# EAGLE board Dclock (EAGLE 8.7.0)
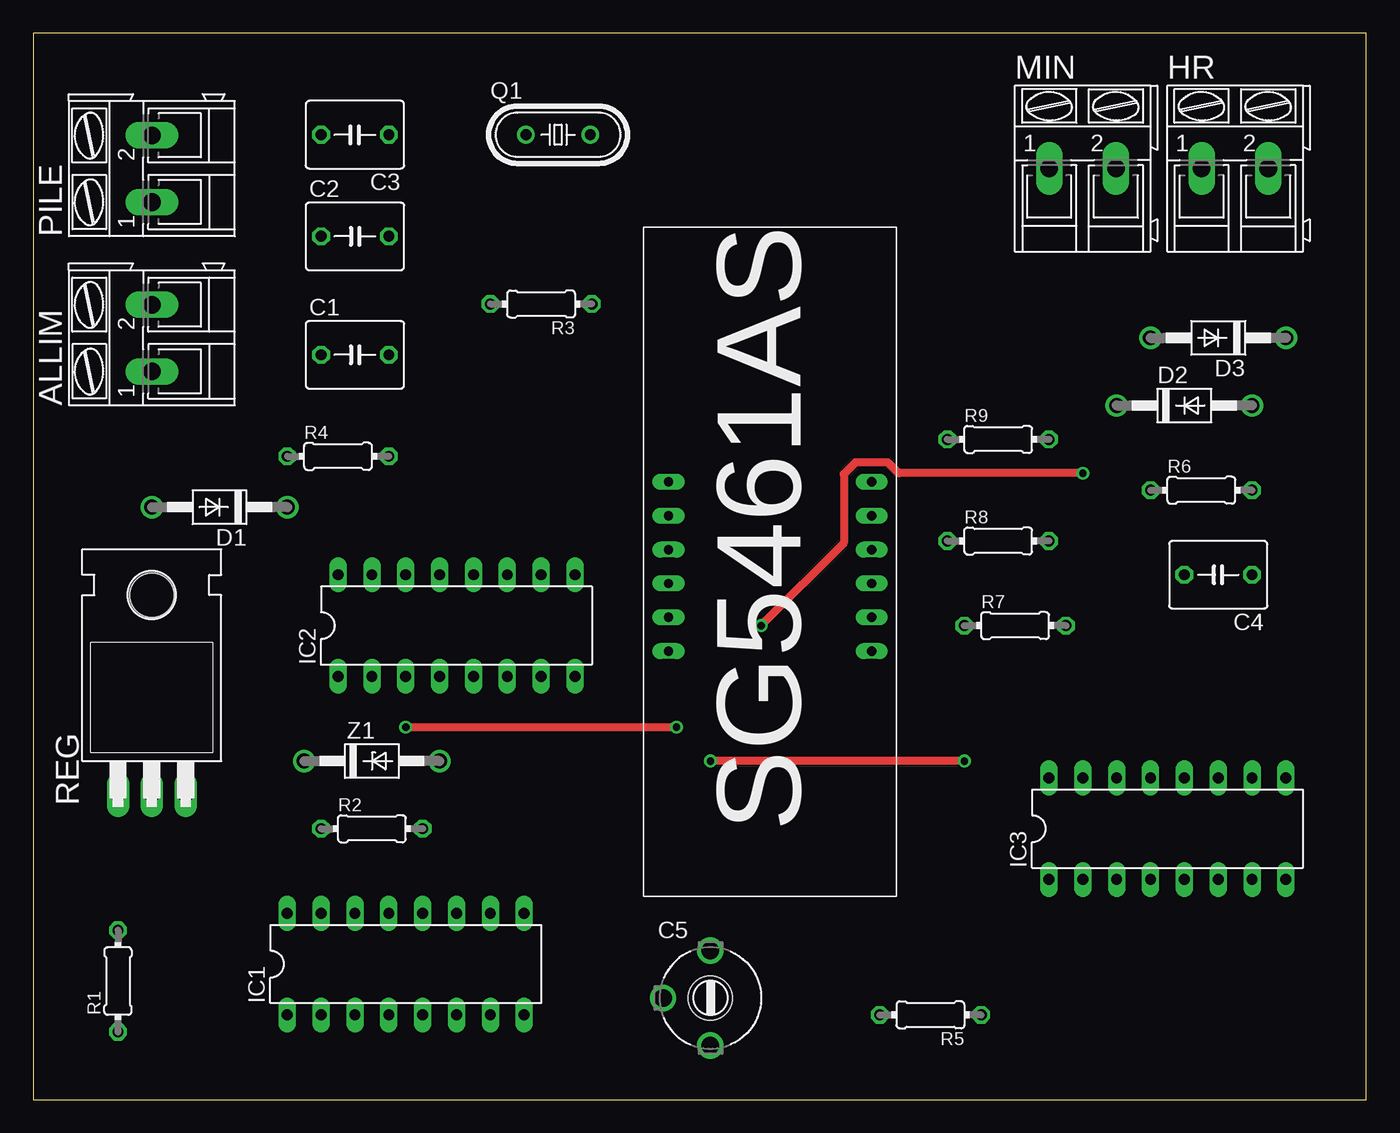
[diagram p0: board, top side]
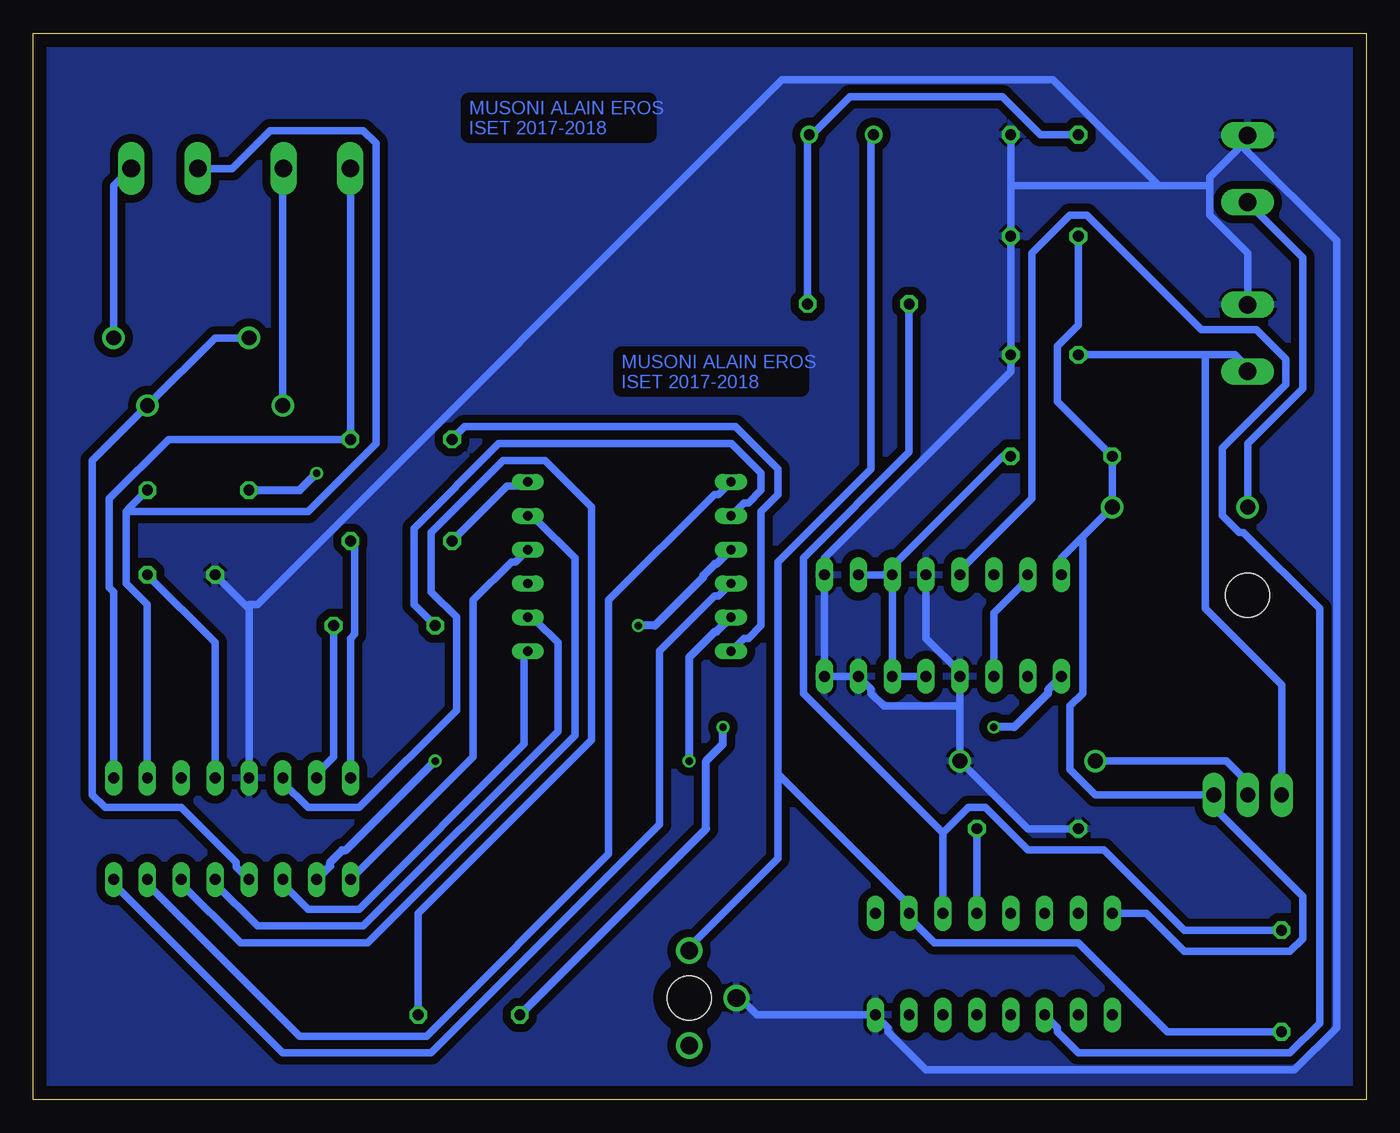
[diagram p1: board, bottom side, seen from below]

Size 100 x 80 mm. Coordinates in mm from the lower left corner, seen from the top.
Outline: 0,0 100,0 100,80 0,80 0,0
Copper layers (1*16): Top 0.035mm / dielectric 1.5mm / Bottom 0.035mm
Design rules "default *": minimum track width 22mil, minimum drill 0.35mm, track to track 22mil, track to pad 22mil, pad to pad 22mil, via to via 22mil, smd to smd 22mil, copper to edge 40mil, drill to drill 6mil, minimum pad ring 10mil, minimum via ring 8mil, stop-mask expansion 4mil, vias tented up to drill 0mil, thermal gap 10mil

## Footprints (pad centres in the part's own frame; a part is rotated, then mirrored left to right if it is on the bottom)
AK300/2 = drill 1.321 long: 1 -2.515,0; 2 2.489,0
C050-050X075 = drill 0.813 octagon: 1 -2.54,0; 2 2.54,0
CTRIM808-1 = drill 1.321: 1 -3.556,0; 2 0,-3.556; 3 3.556,0 | hole 3.302: 0,0
DO41-10 = drill 1.118: A 5.08,0; C -5.08,0
DIL16 = drill 0.813 long: 1 -8.89,-3.81; 2 -6.35,-3.81; 3 -3.81,-3.81; 4 -1.27,-3.81; 5 1.27,-3.81; 6 3.81,-3.81; 7 6.35,-3.81; 8 8.89,-3.81; 9 8.89,3.81; 10 6.35,3.81; 11 3.81,3.81; 12 1.27,3.81; 13 -1.27,3.81; 14 -3.81,3.81; 15 -6.35,3.81; 16 -8.89,3.81
HC49/S = drill 0.813: 1 -2.413,0; 2 2.413,0
0204/7 = drill 0.813 octagon: 1 -3.81,0; 2 3.81,0
TO220H = drill 1.118 long: 1 -2.54,-10.16; 2 0,-10.16; 3 2.54,-10.16 | hole 3.302: 0,4.826
4DIGIT7SEG12PIN = drill 0.7 long: P$1 18.4,1.88; P$2 20.94,1.88; P$3 23.48,1.88; P$4 26.02,1.88; P$5 28.56,1.88; P$6 31.1,1.88; P$7 31.1,17.11; P$8 28.55,17.11; P$9 26.02,17.11; P$10 23.48,17.11; P$11 20.94,17.11; P$12 18.4,17.11
DO41Z10 = drill 1.118: A 5.08,0; C -5.08,0

## Placement (x,y rotation side)
ALLIM  [AK300/2]  8.89,57.15 90 top
C1  [C050-050X075]  24.13,55.88 0 top
C2  [C050-050X075]  24.13,64.77 0 top
C3  [C050-050X075]  24.13,72.39 180 top
C4  [C050-050X075]  88.9,39.37 180 top
C5  [CTRIM808-1]  50.8,7.62 270 top
D1  1N4004  [DO41-10]  13.97,44.45 180 top
D2  1N4004  [DO41-10]  86.36,52.07 0 top
D3  1N4004  [DO41-10]  88.9,57.15 180 top
HR  [AK300/2]  90.17,69.85 0 top
IC1  4060N  [DIL16]  27.94,10.16 0 top
IC2  4027N  [DIL16]  31.75,35.56 0 top
IC3  [DIL16]  85.09,20.32 0 top
MIN  [AK300/2]  78.74,69.85 0 top
PILE  [AK300/2]  8.89,69.85 90 top
Q1  [HC49/S]  39.37,72.39 0 top
R1  [0204/7]  6.35,8.89 90 top
R2  [0204/7]  25.4,20.32 0 top
R3  [0204/7]  38.1,59.69 180 top
R4  [0204/7]  22.86,48.26 0 top
R5  [0204/7]  67.31,6.35 180 top
R6  [0204/7]  87.63,45.72 0 top
R7  [0204/7]  73.66,35.56 0 top
R8  [0204/7]  72.39,41.91 0 top
R9  [0204/7]  72.39,49.53 0 top
REG  7805T  [TO220H]  8.89,33.02 0 top
U$1  [4DIGIT7SEG12PIN]  64.77,15.24 90 top
Z1  1N4728  [DO41Z10]  25.4,25.4 0 top

## Library data of the parts
ALLIM HR MIN PILE = con-ptr500; OC_FARNELL: unknown; OC_NEWARK: unknown
C1-C5 = rcl; SPICEPREFIX: C
D1-D3 Z1 = diode
IC1 IC2 = 40xx
IC3 = ic-package
Q1 = crystal; OC_FARNELL: 1667008; OC_NEWARK: unknown
R1-R9 = rcl; SPICEPREFIX: R
REG = linear
U$1 = 4-digit-7segement

## Nets
D1: R9.1 U$1.P$12
D2: R6.1 U$1.P$9
D3: R7.1 U$1.P$8
D4: R8.1 U$1.P$6
GND: ALLIM.2 C1.2 C2.2 C3.1 C4.2 C5.2 IC1.8 IC2.4 IC2.7 IC2.8 IC2.9 IC2.12 IC3.13 PILE.2 R2.1 Z1.A
IC1_P10: C5.1 IC1.10 Q1.1 R1.1
IC2_P13: IC1.3 IC2.13
IC3_P: IC2.5 IC2.6 IC2.10 IC2.11 R4.2
IC3_P1: IC3.14 R5.1
IC3_P9: IC3.9 MIN.1 R9.2
IC3_P10: HR.1 IC3.10 R6.2
IC3_P15: IC2.3 IC2.15
LEDA: IC3.2 U$1.P$11
LEDB: IC3.7 U$1.P$7
LEDC: IC3.1 U$1.P$4
LEDD: IC3.5 U$1.P$2
LEDE: IC3.3 U$1.P$1
LEDF: IC3.8 U$1.P$10
LEDG: IC3.6 U$1.P$5
N$1: IC2.1 R5.2
N$2: D2.A D3.A IC3.4
N$3: D2.C MIN.2
N$4: D3.C HR.2
N$5: ALLIM.1 C1.1 REG.1
N$6: REG.2 Z1.C
N$7: C2.1 D1.C IC1.16 IC2.16 R4.1 REG.3
N$8: D1.A PILE.1
N$9: IC3.16 R8.2
N$10: IC3.15 R7.2
N$11: IC1.12 R2.2
N$12: IC1.11 R1.2 R3.2
N$13: C3.2 Q1.2 R3.1
N$17: U$1.P$3
V+: C4.1 IC3.12

## Tracks (layer width: path | path; a pad name or v marks a point on that pad's centre or on a via)
D1
  Bottom 0.559: R9.1 67.63,50.48 47.31,50.48 44.13,47.31 44.13,45.4 45.4,44.13 45.4,35.56 46.35,34.61 46.67,34.61 47.62,33.66 U$1.P$12
D2  (via drill 0.55)
  Top 0.61: v54.61,35.56 60.82,41.77 60.82,46.95 61.68,47.81 64.1,47.81 64.92,46.99 v78.74,46.99
  Bottom 0.61: R6.1 80.01,45.72 v78.74,46.99 | v54.61,35.56 53.36,35.56 49.73,39.19 49.73,39.33 48.87,40.19 48.73,40.19 U$1.P$9
D3
  Bottom 0.559: R7.1 71.44,37.15 71.44,42.86 65.09,49.21 47.62,49.21 45.4,46.99 45.4,45.72 46.35,44.77 46.67,44.77 47.62,43.81 U$1.P$8
D4
  Bottom 0.559: R8.1 64.45,46.04 63.18,46.04 U$1.P$6
GND
  Bottom 0.559: R2.1 25.4,20.32 Z1.A 30.48,29.53 | 30.48,29.53 IC2.4 30.48,32.07 33.02,34.61 IC2.12 | 30.48,29.53 36.2,29.53 37.15,30.48 37.15,30.8 IC2.7 IC2.8 IC2.9 40.64,40.64 26.67,54.61 C1.2 C2.2 26.67,68.58 | IC3.13 83.82,36.83 83.98,36.99 | C4.2 83.98,36.99 | 26.67,68.58 C3.1 | C5.2 46.99,7.62 45.72,6.35 IC1.8 35.88,5.4 35.88,5.08 33.02,2.22 5.4,2.22 2.22,5.4 2.22,64.45 9.21,71.44 PILE.2 8.89,72.07 11.75,69.22 11.75,68.58 | ALLIM.2 8.89,63.5 11.75,66.36 11.75,68.58 | 11.75,68.58 15.56,68.58 | 15.56,68.58 26.67,68.58 | 15.56,68.58 23.5,76.52 43.81,76.52 83.19,37.15 83.82,37.15 83.98,36.99
  pour Bottom (isolate 0.61): 0,80.01 0,0 100.33,0 100.33,80.01
IC1_P10
  Bottom 0.559: R1.1 14.92,5.08 21.59,11.75 32.38,11.75 34.29,13.65 IC1.10 34.29,14.61 44.13,24.45 | 44.13,24.45 44.13,18.1 50.8,11.43 C5.1 | 44.13,24.45 44.13,40.32 37.15,47.31 37.15,72.39 Q1.1
IC2_P13
  Bottom 0.559: IC1.3 23.18,5.4 23.18,5.08 21.59,3.49 5.71,3.49 3.49,5.71 3.49,36.83 9.21,42.55 9.53,42.55 10.79,43.81 10.79,48.9 6.03,53.66 6.03,55.56 8.26,57.78 12.38,57.78 20.95,66.36 22.23,66.36 25.08,63.5 25.08,45.09 30.48,39.69 IC2.13
IC3_P
  Bottom 0.559: IC2.5 IC2.6 IC2.11 36.2,39.37 | IC2.10 36.2,39.37 | R4.2 27.3,48.26 36.2,39.37
IC3_P1
  Bottom 0.559: R5.1 71.12,13.97 58.1,26.99 58.1,44.45 61.59,47.94 64.77,47.94 70.17,42.55 70.17,38.1 68.26,36.2 68.26,29.21 75.56,21.91 79.38,21.91 81.28,23.81 IC3.14
IC3_P9
  Bottom 0.559: IC3.9 93.98,38.1 94.3,38.42 94.3,45.09 89.85,49.53 R9.2 76.2,69.85 MIN.1
IC3_P10
  Bottom 0.559: IC3.10 91.44,37.15 93.03,38.73 93.03,44.13 92.87,44.29 | R6.2 92.87,44.29 | HR.1 85.09,69.85 82.23,72.71 75.25,72.71 74.3,71.75 74.3,49.21 79.38,44.13 92.71,44.13 92.87,44.29
IC3_P15
  Bottom 0.559: IC2.3 27.94,36.51 25.4,39.05 IC2.15
LEDA  (via drill 0.55)
  Top 0.61: v69.85,25.4 v50.8,25.4
  Bottom 0.61: IC3.2 77.72,17.53 77.72,17.8 76.83,18.69 76.56,18.69 v69.85,25.4 | U$1.P$11 48.73,35.11 48.87,35.11 50.8,33.18 v50.8,25.4
LEDB
  Bottom 0.559: IC3.7 91.44,16.19 80.01,4.76 70.48,4.76 56.83,18.41 56.83,37.47 48.9,45.4 48.58,45.4 47.94,46.04 U$1.P$7
LEDC
  Bottom 0.559: IC3.1 66.99,25.72 66.99,37.47 64.14,40.32 63.82,40.32 63.18,40.96 U$1.P$4
LEDD
  Bottom 0.559: IC3.5 86.36,16.19 83.19,13.02 75.25,13.02 60.64,27.62 60.64,34.29 62.23,35.88 62.87,35.88 U$1.P$2
LEDE
  Bottom 0.559: IC3.3 81.28,16.19 79.38,14.29 75.56,14.29 63.18,26.67 63.18,33.34 U$1.P$1
LEDF
  Bottom 0.559: IC3.8 93.98,16.19 81.28,3.49 70.17,3.49 53.02,20.64 53.02,33.66 48.9,37.78 48.58,37.78 47.94,38.42 U$1.P$10
LEDG
  Bottom 0.559: IC3.6 88.9,16.19 84.45,11.75 74.93,11.75 59.37,27.3 59.37,40.64 62.23,43.5 62.87,43.5 U$1.P$5
N$1  (via drill 0.55)
  Top 0.61: v27.94,27.94 v48.26,27.94
  Bottom 0.61: R5.2 49.53,20.32 49.53,25.4 48.26,26.67 v48.26,27.94 | IC2.1 23.88,30.73 23.88,30.46 26.39,27.94 v27.94,27.94
N$2
  Bottom 0.559: IC3.4 84.77,17.46 84.77,17.78 88.9,21.91 94.61,21.91 95.57,22.86 95.57,47.94 D2.A 86.36,57.15 D3.A
N$3
  Bottom 0.559: D2.C 81.28,69.85 MIN.2
N$4
  Bottom 0.559: D3.C 93.98,68.58 92.71,69.85 HR.2
N$5
  Bottom 0.559: 12.06,55.88 9.84,55.88 8.89,54.93 ALLIM.1 | 12.06,55.88 C1.1 | REG.1 6.35,31.11 12.06,36.83 12.06,55.88
N$6
  Bottom 0.559: REG.2 8.89,23.81 10.48,25.4 Z1.C
N$7
  Bottom 0.559: IC1.16 16.51,13.97 13.65,11.11 5.71,11.11 4.76,12.06 4.76,15.24 11.43,21.91 REG.3 20.32,22.86 22.23,24.77 22.23,29.53 21.27,30.48 21.27,41.91 21.43,42.07 | IC2.16 22.86,40.64 21.43,42.07 | 21.43,42.07 D1.C R4.1 23.18,52.39 23.18,56.52 21.59,58.1 C2.1
N$8
  Bottom 0.559: D1.A 8.89,49.21 4.76,53.34 4.76,63.18 8.89,67.31 PILE.1
N$9
  Bottom 0.559: IC3.16 76.2,34.61 75.88,34.92 75.88,41.59 R8.2
N$10
  Bottom 0.559: R7.2 77.47,25.72 78.74,24.45 IC3.15
N$11
  Bottom 0.559: R2.2 IC1.12
N$12
  Bottom 0.559: R1.2 13.65,12.7 19.68,18.73 25.4,18.73 28.57,21.91 29.84,21.91 31.75,20 | IC1.11 31.75,20 | R3.2 34.29,48.58 42.23,40.64 42.23,30.48 31.75,20
N$13
  Bottom 0.559: C3.2 24.45,72.39 27.3,75.25 38.73,75.25 41.59,72.39 Q1.2 41.91,72.39 R3.1
V+
  Bottom 0.559: IC3.12 86.36,34.29 C4.1

## Text on the board
Bottom: MUSONI ALAIN EROS / ISET 2017-2018 | MUSONI ALAIN EROS / ISET 2017-2018